# Allegro board AUTO_SAVE.brd
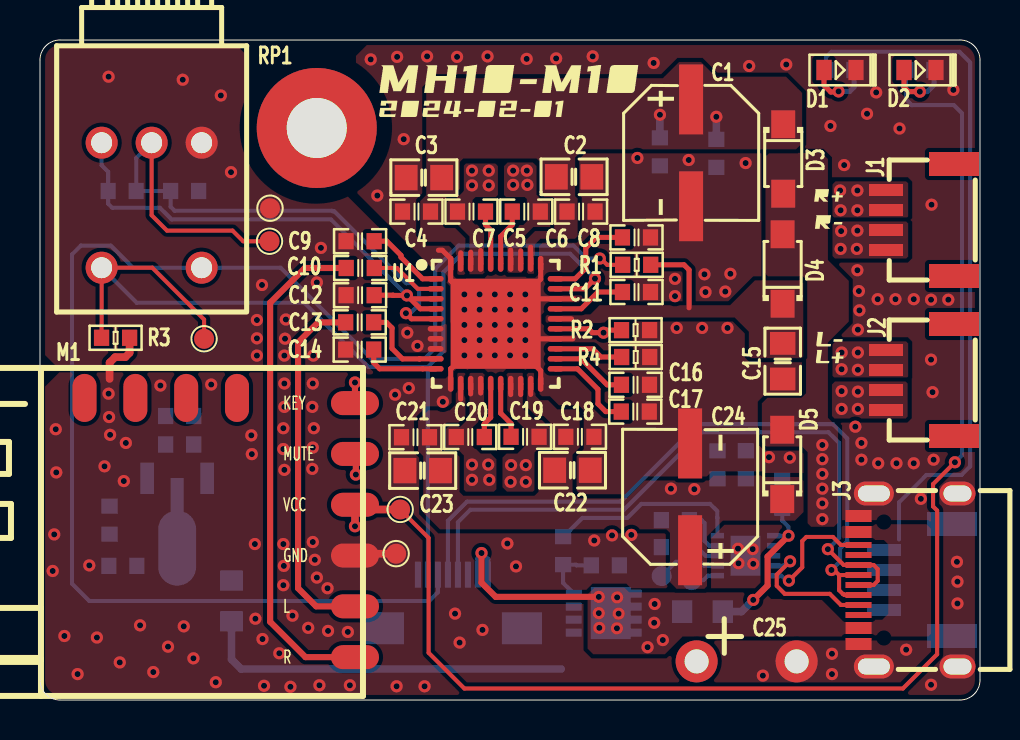
[diagram p0: board, top side]
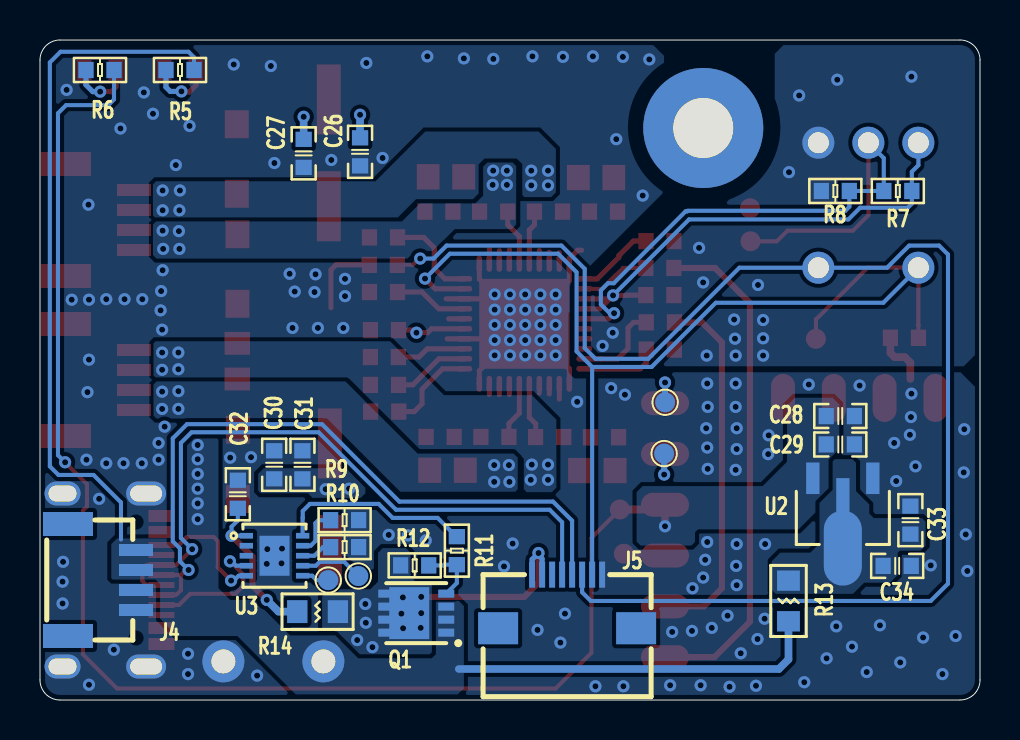
[diagram p1: board, bottom side, seen from below]

Outline 47 x 33 mm; copper layers: TOP, BOTTOM. Coordinates in mm from the lower left corner of the outline.
Outline path: 0,32 0,1 arc(0.29,0.29) 1,0 46,0 arc(46.71,0.29) 47,1 47,32 arc(46.71,32.71) 46,33 1,33 arc(0.29,32.71) 0,32

## Design rules (mm)
constraint set DEFAULT: min track width 0.203

## Placement (name value [footprint] x y rotation side)
C1  330uF  [CAP_SMD-6_3X7_7]  32.56 27.36 270 top
C2  10uF  [C0805]  26.7 26.16 180 top
C3  10uF  [C0805]  19.19 26.12 180 top
C4  1uF  [C0603]  18.82 24.42 180 top
C5  1uF  [C0603]  24.31 24.42 0 top
C6  1uF  [C0603]  27.05 24.42 0 top
C7  1uF  [C0603]  21.57 24.42 180 top
C8  1uF  [C0603]  29.82 23.13 180 top
C9  1uF  [C0603]  16.01 22.94 180 top
C10  1uF  [C0603]  16.01 21.6 180 top
C11  1uF  [C0603]  29.82 20.4 180 top
C12  1uF  [C0603]  16.01 20.24 180 top
C13  1uF  [C0603]  15.99 18.88 180 top
C14  1uF  [C0603]  15.99 17.52 180 top
C15  10uF  [C0805]  37.13 16.94 90 top
C16  220pF  [C0603]  29.77 15.76 180 top
C17  1uF  [C0603]  29.76 14.42 180 top
C18  1uF  [C0603]  26.99 13.16 0 top
C19  1uF  [C0603]  24.25 13.16 0 top
C20  1uF  [C0603]  21.51 13.15 180 top
C21  1uF  [C0603]  18.77 13.14 180 top
C22  10uF  [C0805]  26.62 11.49 180 top
C23  10uF  [C0805]  19.13 11.47 180 top
C24  330uF  [CAP_SMD-6_3X7_7]  32.51 10.16 90 top
C25  1000uF  [CE_TH-12_5X5_0-D0_6]  35.33 1.93 0 top
C26  10uF  [C0603]  31 27.41 90 bottom
C27  0.1uF  [C0603]  33.82 27.33 90 bottom
C28  0.1uF  [C0603]  6.99 14.2 180 bottom
C29  10uF  [C0603]  6.99 12.78 180 bottom
C30  10uF  [C0603]  35.29 11.76 90 bottom
C31  0.1uF  [C0603]  33.88 11.76 90 bottom
C32  1uF  [C0603]  37.11 10.29 270 bottom
C33  10uF  [C0603]  3.48 8.99 90 bottom
C34  0.1uF  [C0603]  4.14 6.71 180 bottom
D1  Green  [LED0603]  40 31.5 0 top
D2  Green  [LED0603]  44 31.5 0 top
D3  DSK34  [SOD-123FL]  37.16 27.05 270 top
D4  DSK34  [SOD-123FL]  37.13 21.55 90 top
D5  DSK34  [SOD-123FL]  37.11 11.78 90 top
J1  1.0 4P SMD  [CON_1-4P-SMD]  44 24 90 top
J2  1.0 4P SMD  [CON_1-4P-SMD]  44 16 90 top
J3  Type-C 12P  [TYPE-C-12P]  43.4 6 90 top
J4  1.0 4P SMD  [CON_1-4P-SMD]  43.9 6 270 bottom
J5  FPC_8P  [FPC_05-8P]  20.64 4.93 0 bottom
M1  -  [MH-M18]  16.15 0.2 180 top
NOREF  -  []  49.4 29.71 0 top
NOREF#2  -  []  48.49 18.69 0 top
NOREF#3  -  []  48.49 19.32 0 top
NOREF#4  -  []  21.84 30.81 0 top
NOREF#5  -  []  23.34 29.16 0 top
NOREF#6  -  []  49.67 33.04 0 top
Q1  RU30L30M-VB  [DFN-8-3X3-EP]  28.19 4.34 90 bottom
R1  10K  [R0603]  29.83 21.76 0 top
R2  1K  [R0603]  29.78 18.49 0 top
R3  100K  [R0603]  3.78 18.11 0 top
R4  120K  [R0603]  29.78 17.15 0 top
R5  10K  [R0603]  40 31.5 180 bottom
R6  10K  [R0603]  44 31.5 180 bottom
R7  2.2K  [R0603]  4.11 25.45 180 bottom
R8  2.2K  [R0603]  7.23 25.45 180 bottom
R9  1K  [R0603]  31.77 8.99 0 bottom
R10  10K  [R0603]  31.77 7.65 0 bottom
R11  5.1K  [R0603]  26.16 7.47 270 bottom
R12  51K  [R0603]  28.26 6.73 0 bottom
R13  5R  [R0805]  9.58 4.95 90 bottom
R14  10R  [R0805]  33.12 4.42 180 bottom
RP1  10K  [RK097NS]  5.58 24.74 90 top
TP1  -  [M3]  13.84 28.6 0 top
TP2  SMD  [TP_SMD]  11.5 24.59 0 top
TP3  SMD  [TP_SMD]  11.48 22.94 0 top
TP4  SMD  [TP_SMD]  8.2 18.06 0 top
TP5  SMD  [TP_SMD]  18.01 9.53 0 top
TP6  SMD  [TP_SMD]  17.81 7.32 0 top
TP7  SMD  [TP_SMD]  15.74 14.88 180 bottom
TP8  SMD  [TP_SMD]  15.79 12.32 180 bottom
TP9  SMD  [TP_SMD]  31.08 6.2 180 bottom
TP10  SMD  [TP_SMD]  32.59 5.99 180 bottom
U1  PAM8610TR  [WQFN40-EP-6X6]  22.78 18.81 270 top
U2  HT7550S  [SOT-89-3]  6.86 9.73 90 bottom
U3  HUSB238  [DFN-10L-EP]  35.28 7.21 270 bottom

## Library data of the parts
C1 C24 C25 = CE
C2-C23 C26-C34 = C
D1 D2 = LED
D3-D5 = DIODE SCHOTTKY
J1 J2 J4 = CON_6
J3 = TYPE-C_12P_SMD
J5 = CON_10
M1 = MH-M18
Q1 = RU30L30M-VB
R1-R14 = R
RP1 = RK097NS
TP1-TP10 = TP
U1 = PAM8610TR
U2 = HT7550
U3 = HUSB238

## Footprints (pads in the part's own frame, mm; a bottom-side part is the same pattern mirrored in y, then rotated)
C0603
  rect 0.762x0.813 smd: 1(-0.701,0) 2(0.701,0)
C0805
  rect 1.143x1.27 smd: 1(-0.889,0) 2(0.889,0)
CAP_SMD-6_3X7_7
  rect 3.5x1.199 smd: 1(-2.67,0) 2(2.67,0)
CE_TH-12_5X5_0-D0_6
  round 2.1 hole 1.2: 1(-2.5,0) 2(2.5,0)
CON_1-4P-SMD
  rect 0.6x1.7 smd: 1(-1.5,1.7) 2(-0.5,1.7) 3(0.5,1.7) 4(1.5,1.7)
  rect 1.2x2.5 smd: 5(2.8,-1.7) 6(-2.8,-1.7)
DFN-8-3X3-EP
  rect 0.4x0.8 smd: 1(-0.975,-1.5) 2(-0.325,-1.5) 3(0.325,-1.5) 4(0.975,-1.5) 5(0.975,1.5) 6(0.325,1.5) 7(-0.325,1.5) 8(-0.975,1.5)
  rect 2.6x2 smd: 9(0,0.35)
DFN-10L-EP
  rect 0.28x0.665 smd: 1(-1,-1.407) 2(-0.5,-1.407) 3(0,-1.407) 4(0.5,-1.407) 5(1,-1.407) 6(1,1.407) 7(0.5,1.407) 8(0,1.407) 9(-0.5,1.407) 10(-1,1.407)
  rect 2x1.5 smd: 11(0,0)
FPC_05-8P
  rect 0.3x1.3 smd: 1(-1.75,-1.34) 2(-1.252,-1.338) 3(-0.75,-1.34) 4(-0.25,-1.34) 5(0.25,-1.34) 6(0.75,-1.34) 7(1.25,-1.34) 8(1.75,-1.34)
  rect 2x1.6 smd: 9(3.45,1.34) 10(-3.45,1.34)
LED0603
  rect 0.762x1.016 smd: 1(-0.8,0) 2(0.8,0)
M3
  round 6 hole 3: 1(0,0)
MH-M18
  oval 2.4x1.2 smd: 1(0.4,-14.64) 2(0.4,-12.1) 3(0.4,-9.56) 4(0.4,-7.02) 5(0.4,-4.48) 6(0.4,-1.94)
  oval 1.2x2.4 smd: 7(6.3,-14.9) 8(8.84,-14.9) 9(11.38,-14.9) 10(13.92,-14.9)
R0603
  rect 0.762x0.813 smd: 1(-0.701,0) 2(0.701,0)
R0805
  rect 1.016x1.143 smd: 1(-1.016,0) 2(1.016,0)
RK097NS
  round 1.6 hole 1.05: 1(3.125,-2.5) 2(3.125,0) 3(3.125,2.5) 4(-3.125,2.5) 5(-3.125,-2.5)
SOD-123FL
  rect 1.399x1.199 smd: 1(1.735,0) 2(-1.735,0)
SOT-89-3
  rect 1.575x0.673 smd: 1(1.356,-1.501) 3(1.356,1.499)
  custom 5.375x1.9 smd: 2(-1.321,0)
TP_SMD
  round 1.001 smd: 1(0,0)
TYPE-C-12P
  rect 0.3x1.301 smd: A1(-3.35,2.474) A4(-2.55,2.474) A5(-1.25,2.474) A6(-0.25,2.474) A7(0.25,2.474) A8(1.25,2.474) A9(2.55,2.474) A12(3.35,2.474) B1(3.05,2.474) B4(2.25,2.474) B5(1.75,2.474) B6(0.75,2.474) B7(-0.75,2.474) B8(-1.75,2.474) B9(-2.25,2.474) B12(-3.05,2.474)
  oval 1.199x1.999 hole 0.8x1.6: G1(-4.325,1.706) G2(4.325,1.706)
  oval 1.199x1.801 hole 0.8x1.399: G3(-4.325,-2.474) G4(4.325,-2.474)
WQFN40-EP-6X6
  oval 0.279x0.8 smd: 1(-2.25,-3) 2(-1.75,-3) 3(-1.25,-3) 4(-0.75,-3) 5(-0.25,-3) 6(0.25,-3) 7(0.75,-3) 8(1.25,-3) 9(1.75,-3) 10(2.25,-3) 21(2.25,3) 22(1.75,3) 23(1.25,3) 24(0.75,3) 25(0.25,3) 26(-0.25,3) 27(-0.75,3) 28(-1.25,3) 29(-1.75,3) 30(-2.25,3)
  oval 0.8x0.279 smd: 11(3,-2.25) 12(3,-1.75) 13(3,-1.25) 14(3,-0.75) 15(3,-0.25) 16(3,0.25) 17(3,0.75) 18(3,1.25) 19(3,1.75) 20(3,2.25) 31(-3,2.25) 32(-3,1.75) 33(-3,1.25) 34(-3,0.75) 35(-3,0.25) 36(-3,-0.25) 37(-3,-0.75) 38(-3,-1.25) 39(-3,-1.75) 40(-3,-2.25)
  rect 4.501x4.501 smd: 41(0,0)

## Nets
5V: C28.1 C29.1 M1.3(VCC) R6.2 TP5.1 U2.3(VOUT)
AGND: C9.2 C12.2 C14.2 R8.1 RP1.1 TP2.1 U1.6 U1.7 U1.8
AVDD: C12.1 R7.2 RP1.3 U1.3 U1.4(VREF)
GND: C1.2 C2.1 C3.2 C4.2 C6.2 C8.1 C11.1 C15.1 C16.1 C17.1 C18.2 C21.2 C22.1 C23.2 C24.2 C25.2 C26.1 C27.1 C28.2 C29.2 C30.2 C31.2 C32.1 C33.2 C34.2 D1.2(CATHODE) D2.2(CATHODE) J3.A1 J3.A12 J3.B1 J3.B12 J3.G1 J3.G2 J3.G3 J3.G4 J4.3 J4.4 J5.1 M1.4 R2.2 R3.2 R4.2 R9.1 R10.1 TP6.1 U1.11 U1.20 U1.24 U1.28 U1.31 U1.40 U1.41 U2.1 U3.11
PVCCL: C18.1 C21.1 C22.2 C23.1 C24.1 C30.1 C31.1 D5.2 U1.12 U1.19
PVCCR: C1.1 C2.2 C3.1 C4.1 C6.1 C26.2 C27.2 D3.2 U1.32 U1.39
VBUS: J3.A4 J3.A9 J3.B4 J3.B9(VBUS4) J5.7 J5.8 Q1.5 Q1.6 Q1.7 Q1.8 Q1.9 R12.2 R14.2
VCC: C25.1 D3.1 D4.1 D5.1 J4.1 J4.2 Q1.1 Q1.2 Q1.3(S3) R5.2 R13.1
VIN_EN: J5.3 R1.1 RP1.5
CC1: J3.A5 U3.4
CC2: J3.B5 U3.5
DAC_L: C13.2 M1.5
DAC_R: C10.2 M1.6
EN: J5.2 R3.1 RP1.4 TP4.1 U1.29
LOUT+: C19.2 J2.1 J2.2 U1.17 U1.18
LOUT-: C20.2 J2.3 J2.4 U1.13 U1.14
MUTE: R2.1 U1.25
POWER: C15.2 D4.2 R1.2 U1.26
ROUT+: C5.2 J1.1 J1.2 U1.33 U1.34
ROUT-: C7.2 J1.3 J1.4 U1.37 U1.38
USB_D+: J3.A6 J3.B6 J5.5
USB_D-: J3.A7 J3.B7 J5.4
VOLUME: R7.1 R8.2 RP1.2 TP3.1 U1.5
N773268: C9.1 U1.1
N774002: C10.1 U1.2
N778232: C14.1 U1.10
N778264: C13.1 U1.9
N780483: C7.1 U1.36
N780544: C5.1 U1.35
N782637: C20.1 U1.15
N782641: C19.1 U1.16
N789518: C8.2 U1.30
N790218: C11.2 U1.27
N795863: R4.1 U1.23
N795893: C16.2 U1.22
N796121: C17.2 U1.21
N834858: C33.1 C34.1 R13.2 U2.2
N915510: Q1.4 R11.2 R12.1
N915554: C32.2 R14.1 U3.1
N915558: R11.1 U3.10
N915652: R10.2 U3.8(VSET)
N915660: R9.2 U3.9
N916202: TP9.1 U3.7
N916210: TP10.1 U3.6
N918225: M1.2 TP8.1
N918235: M1.1 TP7.1
N923141: D1.1 R5.1
N9233350: D2.1 R6.1

Pads without a net: J1 5 6; J2 5 6; J3 A8 B8; J4 5 6; J5 6 9 10; M1 7 8 9 10; TP1 1; U3 2 3

## Via types
v1: diameter 0.61, hole 0.305, TOP to BOTTOM, 243 vias

## Routing (per net, layer and track width the routed paths; a pad name or vN(x,y) marks a point on that pad's centre or on a via; arc(x,y) is an arc through that point)
5V: length 70.4
  TOP w0.203: v1(45.75,11.89) 44.65,10.79 44.65,9.68 44.86,9.47 44.86,2.29 43.15,0.58 21.22,0.58 19.43,2.36 19.43,8.1 TP5.1
  TOP w0.381: v1(15.75,8.69) M1.3 15.99,9.53 TP5.1
  BOTTOM w0.203: R6.2 43.3,30.03 43.59,29.74 45.69,29.74 46.1,29.34 46.1,12.24 v1(45.75,11.89)
AGND:
  vias: v1(3.43,31.17) v1(7.14,31.01) v1(9.04,30.23) v1(9.55,26.39) v1(10.85,19) v1(10.85,18.08) v1(10.85,17.22) v1(11.1,20.75) v1(12.22,17.22) v1(12.29,19.02) v1(12.25,18.07) v1(13.67,17.22) v1(13.84,20.88) v1(14.05,22.61) v1(18.36,18.36) v1(18.87,17.7)
AVDD: length 24.7
  TOP w0.254: C12.1 17.65,20.24 17.66,20.23 v1(18.35,20.23) 18.52,20.06 ; U1.3 18.52,20.06 ; 18.52,20.06 19.02,19.56 U1.4
  BOTTOM w0.203: v1(18.35,20.23) 14.55,24.03 6.58,24.03 5.99,24.61 3.61,24.61 3.41,24.82 R7.2 3.41,26.41 3.08,26.74 RP1.3
GND: length 17.9
  TOP w0.254: 19.92,22.49 20.11,22.49 20.53,22.07 U1.40 20.53,20.96 v1(21.22,20.28) ; 26.7,20.06 U1.28 24.49,20.06 v1(24.27,20.28) 25.03,21.05 U1.31 ; v1(24.27,17.23) 25.03,16.46 U1.20 ; U1.11 20.53,16.56 20.55,16.56 v1(21.22,17.23) ; v1(24.27,17.99) 24.82,17.99 24.89,18.06 U1.24 26.64,18.06
  TOP w0.381: M1.4 15.84,7.32 TP6.1 ; 3.48,16.05 3.48,16.87 3.76,17.14 4.27,17.14 4.48,17.36 R3.2
  vias: v1(0.64,6.45) v1(0.71,8.28) v1(0.79,13.54) v1(0.81,11.38) v1(1.22,3.2) v1(1.88,1.3) v1(2.46,6.73) v1(2.84,3.12) v1(3.23,11.68) v1(3.43,15.32) v1(3.45,14.15) v1(3.51,13.26) v1(3.99,1.88) v1(4.19,10.95) v1(4.29,12.85) v1(5,3.73) v1(5.66,1.4) v1(6.02,15.72) v1(6.4,2.67) v1(7.19,3.68) v1(7.67,2.08) v1(8.56,15.77) v1(8.79,0.89) v1(10.57,13.23) v1(10.59,12.29) v1(10.74,7.8) v1(10.77,4.06) v1(11.13,3.05) v1(11.2,0.71) v1(11.96,2.34) v1(12.22,15.82) v1(12.22,14.66) v1(12.17,13.59) v1(12.17,12.55) v1(12.22,11.51) v1(12.17,7.8) v1(12.19,6.71) v1(12.17,5.74) v1(12.52,0.66) v1(12.62,4.22) v1(13.41,3.61) v1(13.64,15.82) v1(13.61,14.66) v1(13.64,12.62) v1(13.61,11.56) v1(13.64,7.9) v1(13.69,13.59) v1(13.74,7.01) v1(13.84,6.12) v1(13.97,0.74) v1(14.38,5.59) v1(14.4,3.45) v1(15.39,3.4) v1(15.49,0.74) v1(16.54,32.03) v1(16.87,25.22) v1(17.75,15.27) v1(17.83,0.69) v1(17.86,32.16) v1(18.19,28.04) v1(18.44,15.6) v1(19.23,0.69) v1(19.35,32.18) v1(20.14,14.91) v1(20.75,4.32) v1(20.85,32.16) v1(20.98,2.87) v1(21.22,19.52) v1(21.22,18.76) v1(21.22,17.99) v1(21.98,20.28) v1(21.98,19.52) v1(21.98,18.76) v1(21.98,17.99) v1(21.98,17.23) v1(22.12,3.51) v1(22.38,32.18) v1(22.74,20.28) v1(22.74,19.52) v1(22.74,18.76) v1(22.74,17.99) v1(22.74,17.23) v1(23.37,7.82) v1(23.5,20.28) v1(23.5,19.52) v1(23.5,18.76) v1(23.5,17.99) v1(23.5,17.23) v1(23.8,6.68) v1(24.33,32.05) v1(24.27,19.52) v1(24.27,18.76) v1(25.81,32.08) v1(27.64,32.18) v1(27.71,7.98) v1(28.6,8.23) v1(29.57,8.26) v1(29.87,27.1) v1(30.68,31.85) v1(31.75,21.06) v1(31.75,20.19) v1(31.84,18.6) v1(32.44,27) v1(33.11,18.6) v1(33.22,21.29) v1(33.27,20.4) v1(34.26,20.42) v1(34.38,18.6) v1(34.52,21.31) v1(34.9,7.57) v1(34.92,6.83) v1(35.28,26.85) v1(35.46,31.7) v1(35.64,7.54) v1(35.66,6.81) v1(36.14,1.22) v1(36.45,12.14) v1(37.31,31.78) v1(37.49,12.12) v1(39.52,28.7) v1(39.6,2.31) v1(39.6,1.3) v1(40.21,26.75) v1(40.77,13.67) v1(40.87,21.49) v1(40.94,20.45) v1(40.89,18.52) v1(40.97,19.48) v1(41.07,12.85) v1(41.07,12.01) v1(41.35,29.31) v1(41.81,30.38) v1(41.88,20.04) v1(41.91,11.84) v1(42.77,20.04) v1(42.82,11.84) v1(42.98,28.57) v1(43.31,2.51) v1(43.69,20.04) v1(43.69,11.84) v1(44.04,10.06) v1(44.58,24.77) v1(44.55,20.02) v1(44.55,17.02) v1(44.63,15.39) v1(44.55,0.76) v1(44.68,12.01) v1(45.42,20.02) v1(45.67,30.51) v1(45.85,6.91) v1(45.87,5.92) v1(45.87,4.83)
PVCCL: length 1.3
  TOP w0.254: 21.03,15.04 U1.12 ; 24.53,15.28 U1.19
  vias: v1(31.55,10.57) v1(32.72,10.54)
PVCCR: length 3.7
  TOP w0.254: 24.53,22.65 U1.32 ; 21.03,22.36 U1.39
  BOTTOM w0.381: C26.2 v1(31,29.26) ; C27.2 v1(33.82,29.16)
VBUS: length 10
  TOP w0.305: v1(27.94,5.16) 22.78,5.16 22.08,5.86 v1(22.08,7.35)
  BOTTOM w0.254: J5.8 22.39,7.03 v1(22.08,7.35) 22.08,7.24 21.89,7.06 J5.7
  vias: v1(27.94,4.34) v1(27.97,3.61) v1(28.85,3.59) v1(28.86,5.13) v1(28.93,4.32) v1(30.38,2.64) v1(30.73,4.8) v1(30.71,3.86) v1(31.14,3)
VCC: length 53.1
  BOTTOM w0.203: 42.95,8.03 42.95,9.88 44.32,11.25 46.08,11.25 46.51,11.68 46.51,31.88 45.97,32.41 39.57,32.41 39.3,32.13 R5.2
  BOTTOM w0.381: 9.58,3.94 9.58,2.03 10.06,1.55 26.06,1.55
  vias: v1(39.12,12.75) v1(39.12,12.04) v1(39.12,11.3) v1(39.12,10.57) v1(39.12,9.83) v1(39.12,9.04)
VIN_EN: length 71.3
  TOP w0.203: v1(27.99,22.07) 28.04,22.07 28.35,21.76 R1.1
  BOTTOM w0.203: J5.3 19.89,5.39 19.46,4.95 2.46,4.95 1.6,5.82 1.6,22.28 2.04,22.72 3.54,22.72 4.64,21.61 RP1.5 12.03,21.61 16.59,17.06 19.22,17.06 19.77,17.6 19.77,21.56 20.93,22.72 26.67,22.72 27.32,22.07 v1(27.99,22.07)
CC1: length 6.9
  TOP w0.203: v1(37.5,6.93) 36.84,6.27 36.84,5.71 37.24,5.31 39.49,5.31 40.05,4.75 J3.A5
  BOTTOM w0.203: v1(37.5,6.93) 37.41,6.93 37.19,6.71 U3.4
CC2: length 6.2
  TOP w0.203: J3.B5 40.05,7.75 39.64,8.15 38.32,8.15 38.11,7.95 38.11,6.64 v1(37.45,5.97)
  BOTTOM w0.203: v1(37.45,5.97) 37.31,5.97 37.07,6.21 U3.5
DAC_L: length 18.3
  TOP w0.305: C13.2 13.9,18.88 12.9,17.88 12.9,5.59 13.81,4.68 M1.5
DAC_R: length 25.4
  TOP w0.305: M1.6 13.27,2.14 11.51,3.91 11.51,19.86 13.24,21.6 C10.2
EN: length 55.1
  TOP w0.203: TP4.1 8.2,19.02 5.61,21.61 RP1.4 3.08,18.75 3.08,18.75 R3.1
  TOP w0.254: v1(27.75,21.07) 27.24,20.56 U1.29
  BOTTOM w0.203: 19.39,16.65 16.42,16.65 13.21,19.86 4.83,19.86 RP1.4 ; 19.39,16.65 20.17,17.43 20.17,21.39 21.09,22.31 26.5,22.31 v1(27.75,21.07) ; 19.39,16.65 J5.2
LOUT+: length 1.1
  TOP w0.254: 23.53,15.27 U1.17 ; 24.03,15.27 U1.18
  vias: v1(23.53,10.91) v1(23.55,11.75) v1(24.29,11.75) v1(24.29,10.91) v1(40.08,15.44) v1(40.08,14.55) v1(40.89,15.42) v1(40.89,14.55)
LOUT-: length 1
  TOP w0.254: 21.53,15.3 U1.13 ; 22.03,15.35 U1.14
  vias: v1(21.6,11.77) v1(21.6,11.01) v1(22.41,11.77) v1(22.46,11.01) v1(40.08,17.37) v1(40.08,16.54) v1(40.89,17.37) v1(40.89,16.51)
MUTE: length 3.4
  TOP w0.254: R2.1 28.3,18.49 v1(28.18,18.37) 27.62,18.37 27.42,18.56 U1.25
POWER: length 4.7
  TOP w0.254: U1.26 26.57,19.06 ; 32.45,19.61 32.45,21.51 32.2,21.76 R1.2
ROUT+: length 1.3
  TOP w0.254: 24.03,22.46 U1.33 ; 23.53,22.5 U1.34
  vias: v1(23.66,26.47) v1(23.66,25.76) v1(24.34,26.47) v1(24.37,25.76) v1(40.03,22.56) v1(40.06,23.44) v1(40.84,22.56) v1(40.87,23.47)
ROUT-: length 1.2
  TOP w0.254: 21.53,22.39 U1.38 ; 22.03,22.48 U1.37
  vias: v1(21.6,26.47) v1(21.6,25.73) v1(22.44,26.47) v1(22.44,25.73) v1(40.01,25.48) v1(40.03,24.49) v1(40.87,25.48) v1(40.87,24.49)
USB_D+: length 33.8
  TOP w0.203: J3.A6 41.68,5.75 41.88,5.95 41.88,6.55 41.68,6.75 J3.B6 40.18,6.75 v1(39.39,7.54)
  BOTTOM w0.203: J5.5 20.89,8.89 21.52,9.51 29.2,9.51 33.07,13.39 39.42,13.39 39.95,12.85 39.95,8.1 v1(39.39,7.54)
USB_D-: length 35.2
  TOP w0.203: 39.95,6.25 39.7,6.5 v1(39.57,6.5) ; 39.95,6.25 J3.A7 ; 39.95,6.25 39.95,5.49 40.15,5.3 40.17,5.3 40.22,5.25 J3.B7
  BOTTOM w0.203: v1(39.57,6.5) 40,6.93 40,7.58 40.36,7.93 40.36,13.08 39.65,13.79 32.9,13.79 29.03,9.92 21.35,9.92 20.39,8.96 J5.4
VOLUME: length 32.6
  TOP w0.203: TP3.1 10.16,22.94 9.63,23.47 6.35,23.47 5.58,24.24 RP1.2
  TOP w0.254: v1(18.3,19.34) 18.58,19.06 U1.5
  BOTTOM w0.203: RP1.2 4.81,27.09 R7.1 R8.2 6.53,24.66 6.74,24.46 14.61,24.46 14.63,24.43 14.72,24.43 18.31,20.84 18.6,20.84 18.96,20.48 18.96,19.78 18.52,19.34 v1(18.3,19.34)
N773268: length 3.9
  TOP w0.254: C9.1 17.34,22.94 18.05,22.23 18.05,22.14 19.13,21.06 U1.1
N774002: length 3.5
  TOP w0.203: C10.1 17.85,21.6 18.89,20.56 U1.2
N778232: length 3.9
  TOP w0.254: U1.10 19.13,16.56 16.99,16.56 16.69,16.86 C14.1
N778264: length 4.5
  TOP w0.254: C13.1 17.32,18.88 17.6,18.6 17.6,17.58 18.13,17.05 18.98,17.05 18.98,17.06 U1.9
N780483: length 2.7
  TOP w0.254: C7.1 22.28,23.76 22.53,23.5 U1.36
N780544: length 2.8
  TOP w0.254: C5.1 23.61,23.76 23.03,23.18 U1.35
N782637: length 2.8
  TOP w0.254: C20.1 22.22,13.81 22.53,14.13 U1.15
N782641: length 2.9
  TOP w0.254: U1.16 23.03,14.34 23.55,13.82 C19.1
N789518: length 4.8
  TOP w0.254: U1.30 26.76,21.06 27.29,21.59 27.29,22.61 27.81,23.13 C8.2
N790218: length 3.7
  TOP w0.254: U1.27 27.06,19.56 27.9,20.4 C11.2
N795863: length 3.5
  TOP w0.254: R4.1 28.05,17.15 27.64,17.56 U1.23
N795893: length 3.8
  TOP w0.254: U1.22 27.05,17.06 28.35,15.76 C16.2
N796121: length 4.6
  TOP w0.254: U1.21 26.87,16.56 27.9,15.53 27.9,14.81 28.29,14.42 C17.2
N915510: length 3.1
  BOTTOM w0.203: R12.1 26.83,6.73 26.79,6.77 R11.2 26.16,5.85 Q1.4
N915554: length 7.9
  TOP w0.305: v1(37.42,8.21) 36.38,7.17 36.38,5.72 v1(35.66,5)
  BOTTOM w0.203: U3.1 v1(37.42,8.21) 37.42,8.66 37.11,8.98 C32.2
  BOTTOM w0.381: v1(35.66,5) 35.08,4.42 R14.1
N915558: length 9.8
  BOTTOM w0.203: U3.10 33.87,9.11 33.86,9.12 33.86,9.44 33.5,9.8 30.06,9.8 29.37,9.11 27.12,9.11 26.18,8.17 R11.1
N915652: length 1.6
  BOTTOM w0.203: R10.2 32.85,7.65 33.28,7.21 U3.8
N915660: length 2.5
  BOTTOM w0.203: R9.2 33.08,8.99 33.23,8.84 33.23,7.95 33.46,7.71 U3.9
N916202: length 3.2
  BOTTOM w0.203: U3.7 33.21,6.71 33.01,6.91 31.8,6.91 TP9.1
N916210: length 1.4
  BOTTOM w0.203: U3.6 33.39,6.21 33.17,5.99 TP10.1
N918225: length 2.1
  TOP w0.305: v1(15.79,11.27) 15.79,12.26 M1.2
  BOTTOM w0.305: TP8.1 v1(15.79,11.27)
N918235: length 2
  TOP w0.305: M1.1 v1(15.75,15.88)
  BOTTOM w0.305: v1(15.75,15.88) 15.75,14.89 TP7.1
N923141: length 3.4
  TOP w0.254: v1(39.93,30.43) 39.9,30.4 39.54,30.4 39.2,30.74 D1.1
  BOTTOM w0.254: R5.1 40.7,30.64 40.49,30.43 v1(39.93,30.43)
N9233350: length 3.3
  TOP w0.254: D2.1 43.2,30.65 43.43,30.42 v1(43.99,30.42)
  BOTTOM w0.254: v1(43.99,30.42) 44.36,30.42 44.7,30.76 R6.1

## Copper pours and planes (outline as drawn; the poured copper is in the pictures)
5V on BOTTOM: 7.04,14.78 7.04,12.55 7.57,12.01 7.57,10.59 8.23,9.93 8.23,9.37 9.07,8.53 14.1,8.53 14.25,8.38 14.25,7.9 14.43,7.72 16.97,7.72 17.17,7.92 17.17,10.39 16.87,10.69 10.87,10.69 9.65,11.91 9.65,14.71 9.25,15.11 7.37,15.11
AGND on TOP: 20.25,17.32 20.38,17.45 20.38,18.7 20.28,18.8 17.98,18.8 17.91,18.72 17.91,17.58 18.16,17.32
AGND on TOP: 0.25,32 0.47,32.53 1,32.75 9.83,32.75 9.83,32.74 10.26,32.31 10.26,27.3 12.4,25.17 15.39,25.17 16.89,23.67 16.92,23.67 17.07,23.52 17.07,19.48 17.73,18.82 20.27,18.82 20.37,18.72 20.37,16.46 20.19,16.28 16.38,16.28 15.98,16.69 0.81,16.69 0.25,17.25
AGND on BOTTOM: 0.25,32 0.47,32.53 1,32.75 9.83,32.75 9.83,32.74 10.26,32.31 10.26,27.3 12.85,24.71 14.94,24.71 20.37,19.28 20.37,16.46 20.19,16.28 16.38,16.28 15.98,16.69 0.81,16.69 0.25,17.25
GND on TOP: 46.75,1 46.53,0.47 46,0.25 1,0.25 0.47,0.47 0.25,1 0.25,15.67 0.97,16.38 15.93,16.38 16.13,16.18 20.24,16.18 20.5,16.43 20.5,20.7 15.8,25.4 15.8,32.21 16.34,32.75 46,32.75 46.53,32.53 46.75,32 ; 2 cut-outs
GND on BOTTOM: 46.75,1 46.53,0.47 46,0.25 1,0.25 0.47,0.47 0.25,1 0.25,15.67 0.97,16.38 15.93,16.38 16.13,16.18 20.24,16.18 20.5,16.43 20.5,20.7 15.8,25.4 15.8,32.21 16.34,32.75 46,32.75 46.53,32.53 46.75,32
PVCCL on TOP: 36.12,11.15 37.97,11.15 38.18,10.95 38.18,9.4 37.74,8.97 34.14,8.97 33.35,8.18 33.35,5.69 33.22,5.56 31.83,5.56 31.5,5.89 31.5,8.36 31.32,8.53 20,8.53 19.16,9.37 19.16,12.19 18.91,12.45 18.91,13.97 19.41,14.48 20.48,14.48 20.79,14.78 20.79,16.23 20.91,16.36 21.22,16.36 21.27,16.31 21.27,14.2 20.94,13.87 20.33,13.87 20.1,13.64 20.1,12.47 20.27,12.31 20.82,12.31 20.98,12.15 20.98,10.4 21.17,10.21 24.72,10.21 24.93,10.41 24.93,12.19 25.08,12.35 25.56,12.35 25.74,12.52 25.74,13.64 25.18,14.2 24.8,14.2 24.34,14.66 24.34,16.28 24.42,16.36 24.67,16.36 24.77,16.26 24.77,15.22 25,14.99 25.41,14.99 25.87,14.53 26.86,14.53 26.98,14.4 26.98,12.62 26.63,12.27 26.63,10.39 26.92,10.09 26.92,10.08 29.34,10.08 30.23,10.97 33.43,10.97 33.68,11.23 36.04,11.23
PVCCL on BOTTOM: 31.7,11.58 35.81,11.58 36.09,11.3 36.09,10.46 35.97,10.34 33.6,10.34 33.38,10.11 30.96,10.11 30.73,10.34 30.73,10.62
PVCCR on TOP: 27.16,27.53 37.8,27.53 38.11,27.84 38.11,30.35 37.3,31.17 33.78,31.17 33.05,31.9 31.95,31.9 31.14,31.09 19.85,31.09 19.31,30.56 19.31,25.25 19.01,24.94 19.01,23.29 19.39,22.91 20.53,22.91 20.79,22.66 20.79,21.39 20.91,21.26 21.19,21.26 21.27,21.34 21.27,23.09 20.76,23.6 20.25,23.6 20.15,23.7 20.15,24.97 20.46,25.27 20.71,25.27 20.99,25.55 20.99,26.9 21.17,27.08 24.82,27.08 25.03,26.87 25.03,25.35 25.23,25.15 25.64,25.15 25.71,25.07 25.71,23.45 24.75,23.45 24.29,22.99 24.29,21.44 24.42,21.31 24.67,21.31 24.75,21.39 24.75,22.78 25.03,23.06 26.76,23.06 26.88,23.19 26.88,25.07 26.76,25.2 26.76,27.13
VBUS on TOP: 27.38,5.28 27.38,2.57 27.66,2.29 31.24,2.29 32.13,3.17 44.42,3.17 44.65,3.4 44.65,8.46 44.32,8.79 40.16,8.79 40.08,8.71 40.08,8.1 40.18,8 42.19,8 42.42,7.77 42.42,4.32 42.11,4.01 40.08,4.01 39.04,5.05 36.55,5.05 36.22,5.38 29.46,5.38 29.24,5.61 27.71,5.61
VBUS on BOTTOM: 28.47,7.37 28.47,6.17 28.19,5.89 27.53,5.89 27.41,5.77 27.41,2.39 27.53,2.26 31.06,2.26 32.26,3.45 32.74,3.45 32.89,3.61 32.89,5.18 32.82,5.26 32.26,5.26 31.98,5.54 30.48,5.54 30.1,5.92 30.1,7.37 29.87,7.59 28.7,7.59
VCC on TOP: 36.27,21.31 36.42,21.16 38.18,21.16 38.3,21.03 38.3,15.34 38.07,15.11 36.37,15.11 36.09,14.83 36.09,12.88 36.3,12.67 38.1,12.67 38.38,12.4 38.38,8.84 38.56,8.66 39.7,8.66 39.9,8.86 39.9,13.64 39.4,14.15 39.4,17.88 40.44,18.92 40.44,20.95 39.4,22 39.4,27.05 39.09,27.36 36.47,27.36 36.27,27.15
VCC on BOTTOM: 26.06,4.95 27.13,4.95 27.2,4.88 27.2,2.29 27.41,2.08 31.09,2.08 32.23,3.23 34.49,3.23 36.27,5 37.49,5 38.07,5.59 38.07,13 38.25,13.18 39.37,13.18 39.7,12.85 39.7,8.18 39.8,8.08 43.15,8.08 43.43,7.8 43.43,6.1 43.36,6.02 41.22,6.02 41,5.79 41,4.06 40.13,3.2 37.13,3.2 34.21,0.28 26.11,0.28 25.81,0.58 25.81,4.7
LOUT+ on TOP: 23.4,16.36 24.11,16.36 24.19,16.28 24.19,14.58 24.7,14.07 25.03,14.07 25.56,13.54 25.56,12.68 25.43,12.55 24.9,12.55 24.72,12.37 24.72,10.47 24.67,10.41 23.35,10.41 23.12,10.64 23.12,12.12 23.33,12.32 23.86,12.32 24.24,12.7 24.24,13.56 23.33,14.48 23.33,16.28
LOUT+ on TOP: 43.28,15.93 43.38,15.82 43.38,14.17 43.28,14.07 39.73,14.07 39.6,14.2 39.6,15.77 39.75,15.93
LOUT+ on BOTTOM: 28.12,12.32 23.32,12.32 23.11,12.12 23.11,10.54 23.24,10.41 28.98,10.41 32.64,14.07 41.17,14.07 41.33,14.22 41.33,15.77 41.17,15.93 31.72,15.93
LOUT- on TOP: 21.52,16.36 22.13,16.36 22.26,16.23 22.26,14.25 21.57,13.56 21.57,12.78 22.03,12.32 22.54,12.32 22.82,12.04 22.82,10.54 22.69,10.41 21.29,10.41 21.19,10.52 21.19,12.22 20.94,12.47 20.35,12.47 20.25,12.57 20.25,13.69 20.35,13.79 21.09,13.79 21.42,14.12 21.42,16.26
LOUT- on TOP: 43.31,17.93 43.41,17.83 43.41,16.18 43.31,16.08 39.75,16.08 39.62,16.21 39.62,17.78 39.78,17.93
LOUT- on BOTTOM: 21.41,10.39 22.66,10.39 22.81,10.54 22.81,12.06 23.29,12.55 28.02,12.55 31.55,16.08 41.17,16.08 41.33,16.23 41.33,17.83 41.22,17.93 29.49,17.93 26.8,15.24 22.4,15.24 21.18,14.02 21.18,10.62
POWER on TOP: 25.36,18.85 28.2,18.85 28.48,19.13 34.73,19.13 35.44,18.42 35.44,17.21 35.56,17.09 38.07,17.09 38.16,17.18 38.16,20.85 38.03,20.98 35.75,20.98 34.5,19.74 27.97,19.74 27.52,19.28 25.38,19.28 25.28,19.18 25.28,18.92
ROUT+ on TOP: 23.43,21.36 24.14,21.36 24.24,21.46 24.24,23.17 24.7,23.62 25.51,23.62 25.64,23.75 25.64,25.02 25.56,25.1 25.15,25.1 24.85,25.4 24.85,26.67 24.65,26.87 23.38,26.87 23.2,26.7 23.2,25.25 23.3,25.15 24.24,25.15 24.34,25.05 24.34,23.93 24.16,23.75 23.99,23.75 23.33,23.09 23.33,21.46
ROUT+ on TOP: 43.31,23.93 43.41,23.83 43.41,22.17 43.31,22.07 39.75,22.07 39.62,22.2 39.62,23.77 39.78,23.93
ROUT+ on BOTTOM: 23.37,26.87 24.64,26.87 24.84,26.67 24.84,25.22 25.23,24.83 28,24.83 28.91,23.93 41.2,23.93 41.35,23.77 41.35,22.25 41.17,22.07 28.63,22.07 28.24,22.45 27.36,22.45 26.26,23.55 23.42,23.55 23.19,23.77 23.19,26.7
ROUT- on TOP: 21.42,21.29 22.13,21.29 22.26,21.41 22.26,23.37 21.85,23.78 21.75,23.78 21.62,23.9 21.62,24.99 21.78,25.15 22.79,25.15 22.89,25.25 22.89,26.7 22.77,26.82 21.29,26.82 21.17,26.7 21.17,25.43 20.89,25.15 20.46,25.15 20.25,24.94 20.25,23.8 20.35,23.7 20.86,23.7 21.34,23.22 21.34,21.36
ROUT- on TOP: 43.31,25.93 43.41,25.83 43.41,24.18 43.31,24.08 39.75,24.08 39.62,24.21 39.62,25.78 39.78,25.93
ROUT- on BOTTOM: 21.44,25.15 22.78,25.15 22.89,25.25 22.89,26.8 23.16,27.08 24.77,27.08 25.07,26.77 25.07,25.32 25.35,25.04 28.19,25.04 29.16,24.08 41.2,24.08 41.35,24.23 41.35,25.78 41.2,25.93 30.23,25.93 27.74,28.42 22.07,28.42 21.21,27.56 21.21,25.37
N834858 on BOTTOM: 6.35,5.31 10.21,5.31 10.41,5.51 10.41,6.93 9.98,7.37 8.48,7.37 8.03,7.82 8.03,9.91 7.47,10.46 7.47,11.89 7.32,12.04 6.38,12.04 6.2,11.86 6.2,10.44 5.54,9.78 5.54,9.32 5.31,9.09 2.9,9.09 2.72,8.92 2.72,7.72 2.97,7.47 4.01,7.47 4.11,7.37 4.11,6.25 4.5,5.87 5.79,5.87
